# Allegro board KPRM_02v2.brd
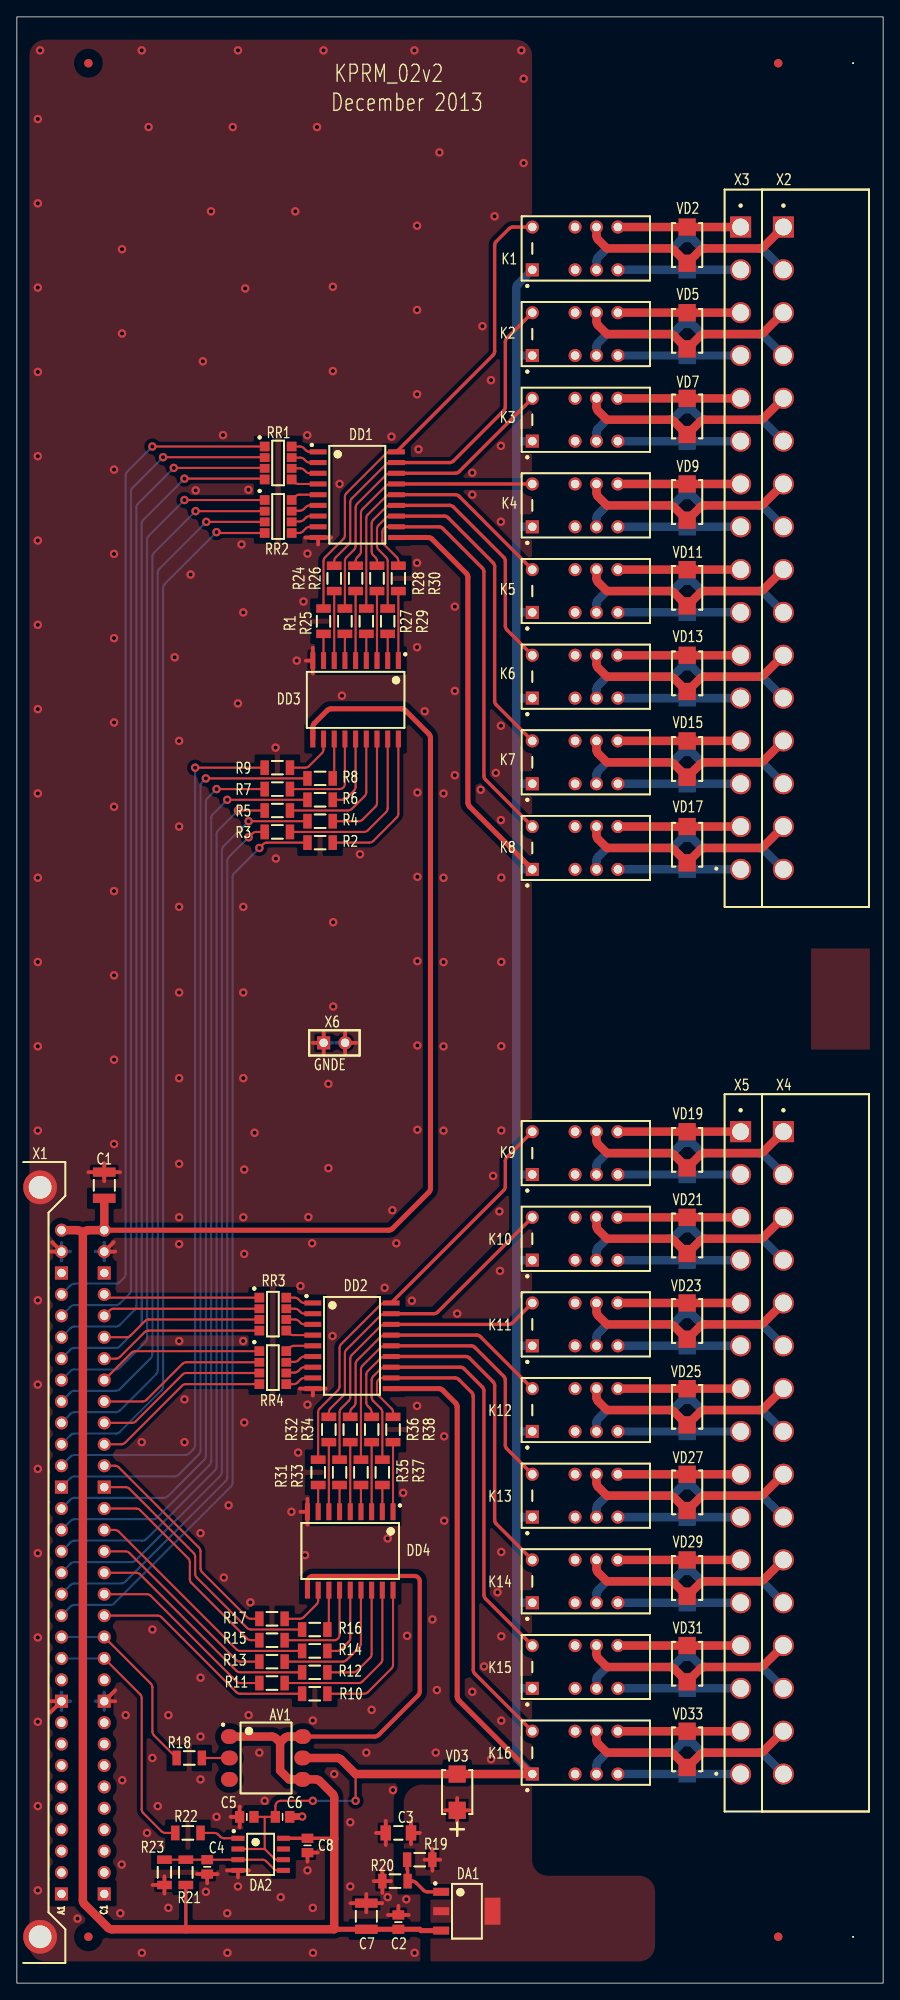
[diagram p0: board, top side]
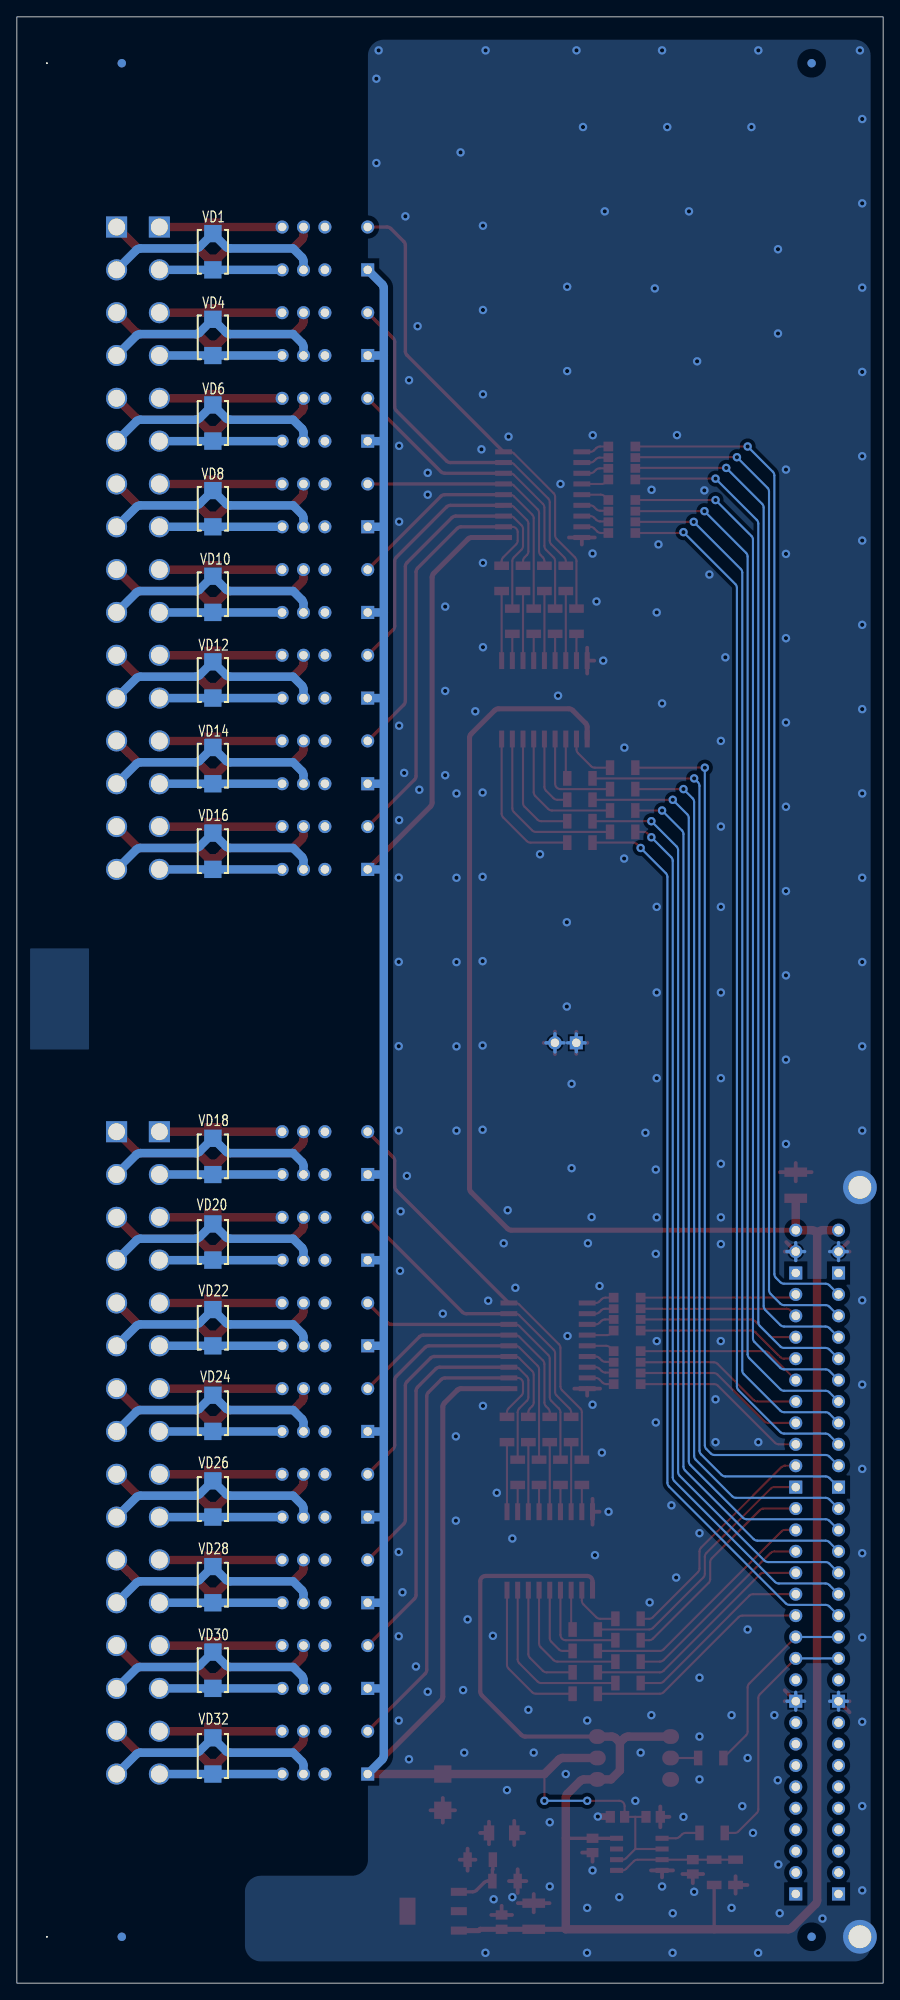
[diagram p1: board, bottom side, seen from below]

Outline 102.87 x 233.25 mm; copper layers: TOP, BOTTOM. Coordinates in mm from the lower left corner of the outline.
Outline path: rectangle 0,0 102.87,233.25

## Design rules (mm)
net group CC: nets CC0 CC1 CC2 CC3 CC4 CC5 CC6 CC7 CC8 CC9 CC10 CC11 CC12 CC13 CC14 CC15
net group CO: nets CO0 CO2 CO3 CO4 CO5 CO6 CO7 CO8 CO9 CO10 CO11 CO12 CO13 CO14 CO15

## Placement (name value [footprint] x y rotation side)
AV1  G3VM-351E  [SOIC254P978X342-6N]  29.59 26.71 0 top
C1  10.0u  [CAPC3225X270N]  10.38 94.65 90 top
C2  0.1u  [CAPC2013X95N]  45.3 7.24 90 top
C3  1.0u  [CAPC3216X145N]  45.3 17.82 180 top
C4  0.1u  [CAPC2013X95N]  22.61 13.79 270 top
C5  0.1u  [CAPC2013X95N]  27.31 19.72 180 top
C6  0.01u  [CAPC2013X95N]  31.55 19.72 0 top
C7  10.0u  [CAPC3225X270N]  41.49 7.94 90 top
C8  0.1u  [CAPC2013X95N]  34.51 16.33 270 top
DA1  LM317  [SOT230P700X180-4N]  53.43 8.53 0 top
DA2  LM293  [SOIC127P600X175-8N]  28.95 15.28 0 top
DD1  ULN2803A  [SOIC127P1030X265-18N]  40.43 176.57 0 top
DD2  ULN2803A  [SOIC127P1030X265-18N]  39.79 75.6 0 top
DD3  ULN2803A  [SOIC127P1030X265-18N]  40.22 152.23 270 top
DD4  ULN2803A  [SOIC127P1030X265-18N]  39.59 51.27 270 top
K1  FX2  [RELAY_FX2]  67.53 205.78 90 top
K2  FX2  [RELAY_FX2]  67.53 195.62 90 top
K3  FX2  [RELAY_FX2]  67.53 185.46 90 top
K4  FX2  [RELAY_FX2]  67.53 175.3 90 top
K5  FX2  [RELAY_FX2]  67.53 165.14 90 top
K6  FX2  [RELAY_FX2]  67.53 154.98 90 top
K7  FX2  [RELAY_FX2]  67.53 144.82 90 top
K8  FX2  [RELAY_FX2]  67.53 134.66 90 top
K9  FX2  [RELAY_FX2]  67.53 98.46 90 top
K10  FX2  [RELAY_FX2]  67.53 88.3 90 top
K11  FX2  [RELAY_FX2]  67.53 78.14 90 top
K12  FX2  [RELAY_FX2]  67.53 67.98 90 top
K13  FX2  [RELAY_FX2]  67.53 57.82 90 top
K14  FX2  [RELAY_FX2]  67.53 47.66 90 top
K15  FX2  [RELAY_FX2]  67.53 37.5 90 top
K16  FX2  [RELAY_FX2]  67.53 27.34 90 top
NOREF  -  [unnamed]  8.49 5.5 0 top
NOREF#2  -  [unnamed]  8.49 227.75 0 top
NOREF#3  -  [unnamed#2]  99.3 5.5 0 top
NOREF#4  -  [unnamed]  90.41 227.75 0 top
NOREF#5  -  [unnamed]  90.41 5.5 0 top
NOREF#6  -  [unnamed#2]  99.3 227.75 0 top
NOREF#7  -  [unnamed]  90.41 227.75 180 bottom
NOREF#8  -  [unnamed]  90.41 5.5 180 bottom
NOREF#9  -  [unnamed]  8.49 227.75 180 bottom
NOREF#10  -  [unnamed]  8.49 5.5 180 bottom
R1  18k  [RESC3116X65N]  36.41 161.56 90 top
R2  2k  [RESC3116X65N]  36.01 135.29 0 top
R3  2k  [RESC3116X65N]  30.93 136.56 0 top
R4  2k  [RESC3116X65N]  36.01 137.83 0 top
R5  2k  [RESC3116X65N]  30.93 139.1 0 top
R6  2k  [RESC3116X65N]  36.01 140.37 0 top
R7  2k  [RESC3116X65N]  30.93 141.64 0 top
R8  2k  [RESC3116X65N]  36.01 142.91 0 top
R9  2k  [RESC3116X65N]  30.93 144.18 0 top
R10  2k  [RESC3116X65N]  35.38 34.33 0 top
R11  2k  [RESC3116X65N]  30.3 35.6 0 top
R12  2k  [RESC3116X65N]  35.38 36.87 0 top
R13  2k  [RESC3116X65N]  30.3 38.14 0 top
R14  2k  [RESC3116X65N]  35.38 39.41 0 top
R15  2k  [RESC3116X65N]  30.3 40.68 0 top
R16  2k  [RESC3116X65N]  35.38 41.95 0 top
R17  2k  [RESC3116X65N]  30.3 43.22 0 top
R18  2k  [RESC3116X65N]  20.47 26.71 180 top
R19  270  [RESC3116X65N]  47.84 14.64 180 top
R20  1k  [RESC3116X65N]  44.9 12.1 0 top
R21  20k  [RESC3116X65N]  20.06 13.14 90 top
R22  2k  [RESC3116X65N]  20.31 17.82 180 top
R23  10k  [RESC3116X65N]  17.52 13.14 90 top
R24  18k  [RESC3116X65N]  37.68 166.64 90 top
R25  18k  [RESC3116X65N]  38.95 161.56 90 top
R26  18k  [RESC3116X65N]  40.22 166.64 90 top
R27  18k  [RESC3116X65N]  41.49 161.56 90 top
R28  18k  [RESC3116X65N]  42.77 166.64 90 top
R29  18k  [RESC3116X65N]  44.03 161.56 90 top
R30  18k  [RESC3116X65N]  45.3 166.64 90 top
R31  18k  [RESC3116X65N]  35.78 60.59 90 top
R32  18k  [RESC3116X65N]  37.05 65.67 90 top
R33  18k  [RESC3116X65N]  38.32 60.59 90 top
R34  18k  [RESC3116X65N]  39.59 65.67 90 top
R35  18k  [RESC3116X65N]  40.86 60.59 90 top
R36  18k  [RESC3116X65N]  42.13 65.67 90 top
R37  18k  [RESC3116X65N]  43.4 60.59 90 top
R38  18k  [RESC3116X65N]  44.67 65.67 90 top
RR1  4.7k  [RESCAX127P320X508X70-8N]  31.03 180.33 0 top
RR2  4.7k  [RESCAX127P320X508X70-8N]  31.03 173.98 0 top
RR3  4.7k  [RESCAX127P320X508X70-8N]  30.39 79.36 0 top
RR4  4.7k  [RESCAX127P320X508X70-8N]  30.39 73.01 0 top
VD1  300B  [DIOM5236X261N_NP]  79.59 205.39 90 bottom
VD2  300B  [DIOM5236X261N_NP]  79.59 206.17 90 top
VD3  STPS160U  [DIOM5236X261N]  52.29 22.65 270 top
VD4  300B  [DIOM5236X261N_NP]  79.59 195.23 90 bottom
VD5  300B  [DIOM5236X261N_NP]  79.59 196.01 90 top
VD6  300B  [DIOM5236X261N_NP]  79.59 185.07 90 bottom
VD7  300B  [DIOM5236X261N_NP]  79.59 185.85 90 top
VD8  300B  [DIOM5236X261N_NP]  79.59 174.91 90 bottom
VD9  300B  [DIOM5236X261N_NP]  79.59 175.69 90 top
VD10  300B  [DIOM5236X261N_NP]  79.59 164.75 90 bottom
VD11  300B  [DIOM5236X261N_NP]  79.59 165.53 90 top
VD12  300B  [DIOM5236X261N_NP]  79.59 154.59 90 bottom
VD13  300B  [DIOM5236X261N_NP]  79.59 155.37 90 top
VD14  300B  [DIOM5236X261N_NP]  79.59 144.43 90 bottom
VD15  300B  [DIOM5236X261N_NP]  79.59 145.21 90 top
VD16  300B  [DIOM5236X261N_NP]  79.59 134.27 90 bottom
VD17  300B  [DIOM5236X261N_NP]  79.59 135.05 90 top
VD18  300B  [DIOM5236X261N_NP]  79.59 98.07 90 bottom
VD19  300B  [DIOM5236X261N_NP]  79.59 98.85 90 top
VD20  300B  [DIOM5236X261N_NP]  79.59 87.91 90 bottom
VD21  300B  [DIOM5236X261N_NP]  79.59 88.69 90 top
VD22  300B  [DIOM5236X261N_NP]  79.59 77.75 90 bottom
VD23  300B  [DIOM5236X261N_NP]  79.59 78.53 90 top
VD24  300B  [DIOM5236X261N_NP]  79.59 67.59 90 bottom
VD25  300B  [DIOM5236X261N_NP]  79.59 68.37 90 top
VD26  300B  [DIOM5236X261N_NP]  79.59 57.43 90 bottom
VD27  300B  [DIOM5236X261N_NP]  79.59 58.21 90 top
VD28  300B  [DIOM5236X261N_NP]  79.59 47.27 90 bottom
VD29  300B  [DIOM5236X261N_NP]  79.59 48.05 90 top
VD30  300B  [DIOM5236X261N_NP]  79.59 37.11 90 bottom
VD31  300B  [DIOM5236X261N_NP]  79.59 37.89 90 top
VD32  300B  [DIOM5236X261N_NP]  79.59 26.95 90 bottom
VD33  300B  [DIOM5236X261N_NP]  79.59 27.73 90 top
X1  DIN-32x2  [DIN_41612_64_MR]  2.12 49.95 0 top
X2  231-576/001-000  [WAGO_231_576_001_000]  94.83 170.22 0 top
X3  232-376  [WAGO_232_376]  92.3 170.22 0 top
X4  231-576/001-000  [WAGO_231_576_001_000]  94.83 62.9 0 top
X5  232-376  [WAGO_232_376]  92.3 62.9 0 top
X6  GNDE  [HDRV1X2P254]  37.7 111.55 0 top

## Library data of the parts
AV1 = OPTO_RELAY_1: alternate symbols: (SOIC254P978X342-6M)
C1-C8 = CAP_NP
DA1 = LM317EMP
DA2 = LM293
DD1-DD4 = ULN2803A
K1-K16 = RELAY_FX2
R1-R38 = RES_0.25W
RR1-RR4 = RES_ARRAY_4
VD1 VD2 VD4-VD33 = DIODE_TVS_BI
VD3 = DIODE_SCHOTTKY
X1 = CON_32X2
X2-X5 = CON_16
X6 = CON_2

## Footprints (pads in the part's own frame, mm; a bottom-side part is the same pattern mirrored in y, then rotated)
CAPC2013X95N
  rect 1.1x1.4 smd: 1(-0.85,0) 2(0.85,0)
CAPC3216X145N
  rect 1.25x1.8 smd: 1(-1.5,0) 2(1.5,0)
CAPC3225X270N
  rect 1.1x2.7 smd: 1(-1.55,0) 2(1.55,0)
DIN_41612_64_MR
  rect 1.55x1.55 hole 1: A1(3.175,-39.37) A10(3.175,-16.51) A20(3.175,8.89) A30(3.175,34.29) C1(8.255,-39.37) C10(8.255,-16.51) C20(8.255,8.89) C30(8.255,34.29)
  round 1.55 hole 1: A2(3.175,-36.83) A3(3.175,-34.29) A4(3.175,-31.75) A5(3.175,-29.21) A6(3.175,-26.67) A7(3.175,-24.13) A8(3.175,-21.59) A9(3.175,-19.05) A11(3.175,-13.97) A12(3.175,-11.43) A13(3.175,-8.89) A14(3.175,-6.35) A15(3.175,-3.81) A16(3.175,-1.27) A17(3.175,1.27) A18(3.175,3.81) A19(3.175,6.35) A21(3.175,11.43) A22(3.175,13.97) A23(3.175,16.51) A24(3.175,19.05) A25(3.175,21.59) A26(3.175,24.13) A27(3.175,26.67) A28(3.175,29.21) A29(3.175,31.75) A31(3.175,36.83) A32(3.175,39.37) C2(8.255,-36.83) C3(8.255,-34.29) C4(8.255,-31.75) C5(8.255,-29.21) C6(8.255,-26.67) C7(8.255,-24.13) C8(8.255,-21.59) C9(8.255,-19.05) C11(8.255,-13.97) C12(8.255,-11.43) C13(8.255,-8.89) C14(8.255,-6.35) C15(8.255,-3.81) C16(8.255,-1.27) C17(8.255,1.27) C18(8.255,3.81) C19(8.255,6.35) C21(8.255,11.43) C22(8.255,13.97) C23(8.255,16.51) C24(8.255,19.05) C25(8.255,21.59) C26(8.255,24.13) C27(8.255,26.67) C28(8.255,29.21) C29(8.255,31.75) C31(8.255,36.83) C32(8.255,39.37)
  round 4 hole 2.7: HOLE1(0.635,-44.45) HOLE2(0.635,44.45)
DIOM5236X261N
  rect 2.05x2.05 smd: A(2.15,0) C(-2.15,0)
DIOM5236X261N_NP
  rect 2.05x2.05 smd: A(2.15,0) C(-2.15,0)
HDRV1X2P254
  rect 1.55x1.55 hole 1: 1(-1.27,0)
  round 1.6 hole 1: 2(1.27,0)
RELAY_FX2
  rect 1.55x1.55 hole 1: 1(-2.54,6.32)
  round 1.55 hole 1: 3(-2.54,1.24) 4(-2.54,-1.3) 5(-2.54,-3.84) 6(2.54,-3.84) 7(2.54,-1.3) 8(2.54,1.24) 10(2.54,6.32)
RESC3116X65N
  rect 1x1.75 smd: 1(-1.5,0) 2(1.5,0)
RESCAX127P320X508X70-8N
  rect 1.15x1.15 smd: 1(-1.6,1.955) 4(-1.6,-1.955) 5(1.6,-1.955) 8(1.6,1.955)
  rect 1.15x1.05 smd: 2(-1.6,0.635) 3(-1.6,-0.635) 6(1.6,-0.635) 7(1.6,0.635)
SOIC127P600X175-8N
  rect 1.55x0.6 smd: 1(-2.7,1.905) 2(-2.7,0.635) 3(-2.7,-0.635) 4(-2.7,-1.905) 5(2.7,-1.905) 6(2.7,-0.635) 7(2.7,0.635) 8(2.7,1.905)
SOIC127P1030X265-18N
  rect 2x0.6 smd: 1(-4.65,5.08) 2(-4.65,3.81) 3(-4.65,2.54) 4(-4.65,1.27) 5(-4.65,0) 6(-4.65,-1.27) 7(-4.65,-2.54) 8(-4.65,-3.81) 9(-4.65,-5.08) 10(4.65,-5.08) 11(4.65,-3.81) 12(4.65,-2.54) 13(4.65,-1.27) 14(4.65,0) 15(4.65,1.27) 16(4.65,2.54) 17(4.65,3.81) 18(4.65,5.08)
SOIC254P978X342-6N
  oval 2x1.75 smd: 1(-4.35,2.54) 2(-4.35,0) 3(-4.35,-2.54) 4(4.35,-2.54) 5(4.35,0) 6(4.35,2.54)
SOT230P700X180-4N
  rect 1.9x0.95 smd: 1(-3.05,2.3) 2(-3.05,0) 3(-3.05,-2.3)
  rect 1.9x3.2 smd: 4(3.05,0)
unnamed
  round 1 smd: (0,0)
unnamed#2
  round 0.2 hole 2.7 unplated: (0,0)
WAGO_231_576_001_000
  rect 2.5x2.5 hole 2: 1(-3.81,38.1)
  round 2.5 hole 2: 2(-3.81,33.02) 3(-3.81,27.94) 4(-3.81,22.86) 5(-3.81,17.78) 6(-3.81,12.7) 7(-3.81,7.62) 8(-3.81,2.54) 9(-3.81,-2.54) 10(-3.81,-7.62) 11(-3.81,-12.7) 12(-3.81,-17.78) 13(-3.81,-22.86) 14(-3.81,-27.94) 15(-3.81,-33.02) 16(-3.81,-38.1)
WAGO_232_376
  rect 2.5x2.5 hole 2: 1(-6.35,38.1)
  round 2.5 hole 2: 2(-6.35,33.02) 3(-6.35,27.94) 4(-6.35,22.86) 5(-6.35,17.78) 6(-6.35,12.7) 7(-6.35,7.62) 8(-6.35,2.54) 9(-6.35,-2.54) 10(-6.35,-7.62) 11(-6.35,-12.7) 12(-6.35,-17.78) 13(-6.35,-22.86) 14(-6.35,-27.94) 15(-6.35,-33.02) 16(-6.35,-38.1)

## Nets
GNDE: C1.2 C2.2 C3.2 C4.2 C5.2 C6.2 C7.2 C8.2 DA2.4 DD1.9(GND) DD2.9(GND) DD3.9(GND) DD4.9(GND) R20.1 R23.1 X1.A10 X1.A31 X1.C10 X1.C31 X1.HOLE1 X1.HOLE2 X6.1 X6.2
1K1-1: K1.5(NO1) VD1.C X3.2
1K1-2: K1.4(01) VD1.A X2.2
1K2-1: K1.6(NO2) VD2.A X3.1
1K2-2: K1.7(02) VD2.C X2.1
2K1-1: K2.5(NO1) VD4.C X3.4
2K1-2: K2.4(01) VD4.A X2.4
2K2-1: K2.6(NO2) VD5.A X3.3
2K2-2: K2.7(02) VD5.C X2.3
3K1-1: K3.5(NO1) VD6.C X3.6
3K1-2: K3.4(01) VD6.A X2.6
3K2-1: K3.6(NO2) VD7.A X3.5
3K2-2: K3.7(02) VD7.C X2.5
4K1-1: K4.5(NO1) VD8.C X3.8
4K1-2: K4.4(01) VD8.A X2.8
4K2-1: K4.6(NO2) VD9.A X3.7
4K2-2: K4.7(02) VD9.C X2.7
5K1-1: K5.5(NO1) VD10.C X3.10
5K1-2: K5.4(01) VD10.A X2.10
5K2-1: K5.6(NO2) VD11.A X3.9
5K2-2: K5.7(02) VD11.C X2.9
6K1-1: K6.5(NO1) VD12.C X3.12
6K1-2: K6.4(01) VD12.A X2.12
6K2-1: K6.6(NO2) VD13.A X3.11
6K2-2: K6.7(02) VD13.C X2.11
7K1-1: K7.5(NO1) VD14.C X3.14
7K1-2: K7.4(01) VD14.A X2.14
7K2-1: K7.6(NO2) VD15.A X3.13
7K2-2: K7.7(02) VD15.C X2.13
8K1-1: K8.5(NO1) VD16.C X3.16
8K1-2: K8.4(01) VD16.A X2.16
8K2-1: K8.6(NO2) VD17.A X3.15
8K2-2: K8.7(02) VD17.C X2.15
9K1-1: K9.5(NO1) VD18.C X5.2
9K1-2: K9.4(01) VD18.A X4.2
9K2-1: K9.6(NO2) VD19.A X5.1
9K2-2: K9.7(02) VD19.C X4.1
10K1-1: K10.5(NO1) VD20.C X5.4
10K1-2: K10.4(01) VD20.A X4.4
10K2-1: K10.6(NO2) VD21.A X5.3
10K2-2: K10.7(02) VD21.C X4.3
11K1-1: K11.5(NO1) VD22.C X5.6
11K1-2: K11.4(01) VD22.A X4.6
11K2-1: K11.6(NO2) VD23.A X5.5
11K2-2: K11.7(02) VD23.C X4.5
12K1-1: K12.5(NO1) VD24.C X5.8
12K1-2: K12.4(01) VD24.A X4.8
12K2-1: K12.6(NO2) VD25.A X5.7
12K2-2: K12.7(02) VD25.C X4.7
13K1-1: K13.5(NO1) VD26.C X5.10
13K1-2: K13.4(01) VD26.A X4.10
13K2-1: K13.6(NO2) VD27.A X5.9
13K2-2: K13.7(02) VD27.C X4.9
14K1-1: K14.5(NO1) VD28.C X5.12
14K1-2: K14.4(01) VD28.A X4.12
14K2-1: K14.6(NO2) VD29.A X5.11
14K2-2: K14.7(02) VD29.C X4.11
15K1-1: K15.5(NO1) VD30.C X5.14
15K1-2: K15.4(01) VD30.A X4.14
15K2-1: K15.6(NO2) VD31.A X5.13
15K2-2: K15.7(02) VD31.C X4.13
16K1-1: K16.5(NO1) VD32.C X5.16
16K1-2: K16.4(01) VD32.A X4.16
16K2-1: K16.6(NO2) VD33.A X5.15
16K2-2: K16.7(02) VD33.C X4.15
+24BE: AV1.1 AV1.4 AV1.6 C1.1 C2.1 C7.1 C8.1 DA1.3(IN) DA2.8 DD3.10(COM) DD4.10(COM) R21.1 X1.A32 X1.C32
+UK: AV1.5 C5.1 C6.1 DA2.2(IN-) DA2.6(IN-) DD1.10(COM) DD2.10(COM) K1.1(IN+) K2.1(IN+) K3.1(IN+) K4.1(IN+) K5.1(IN+) K6.1(IN+) K7.1(IN+) K8.1(IN+) K9.1(IN+) K10.1(IN+) K11.1(IN+) K12.1(IN+) K13.1(IN+) K14.1(IN+) K15.1(IN+) K16.1(IN+) VD3.C
CC0: DD3.8(8B) R1.1
CC1: DD3.7(7B) R24.1
CC2: DD3.6(6B) R25.1
CC3: DD3.5(5B) R26.1
CC4: DD3.4(4B) R27.1
CC5: DD3.3(3B) R28.1
CC6: DD3.2(2B) R29.1
CC7: DD3.1(1B) R30.1
CC8: DD4.8(8B) R31.1
CC9: DD4.7(7B) R32.1
CC10: DD4.6(6B) R33.1
CC11: DD4.5(5B) R34.1
CC12: DD4.4(4B) R35.1
CC13: DD4.3(3B) R36.1
CC14: DD4.2(2B) R37.1
CC15: DD4.1(1B) R38.1
CO0: DD1.18(1C) K1.10(IN-) R1.2
CO1: DD1.17(2C) K2.10(IN-) R24.2
CO2: DD1.16(3C) K3.10(IN-) R25.2
CO3: DD1.15(4C) K4.10(IN-) R26.2
CO4: DD1.14(5C) K5.10(IN-) R27.2
CO5: DD1.13(6C) K6.10(IN-) R28.2
CO6: DD1.12(7C) K7.10(IN-) R29.2
CO7: DD1.11(8C) K8.10(IN-) R30.2
CO8: DD2.18(1C) K9.10(IN-) R31.2
CO9: DD2.17(2C) K10.10(IN-) R32.2
CO10: DD2.16(3C) K11.10(IN-) R33.2
CO11: DD2.15(4C) K12.10(IN-) R34.2
CO12: DD2.14(5C) K13.10(IN-) R35.2
CO13: DD2.13(6C) K14.10(IN-) R36.2
CO14: DD2.12(7C) K15.10(IN-) R37.2
CO15: DD2.11(8C) K16.10(IN-) R38.2
COMO0: RR1.1 X1.A29
COMO1: RR1.2 X1.A28
COMO2: RR1.3 X1.A27
COMO3: RR1.4 X1.A26
COMO4: RR2.1 X1.A25
COMO5: RR2.2 X1.A24
COMO6: RR2.3 X1.A23
COMO7: RR2.4 X1.A22
COMO8: RR3.1 X1.C29
COMO9: RR3.2 X1.C28
COMO10: RR3.3 X1.C27
COMO11: RR3.4 X1.C26
COMO12: RR4.1 X1.C25
COMO13: RR4.2 X1.C24
COMO14: RR4.3 X1.C23
COMO15: RR4.4 X1.C22
ENABLE: R18.2 X1.A13 X1.C13
KCOMO0: R9.1 X1.A21
KCOMO1: R8.1 X1.A20
KCOMO2: R7.1 X1.A19
KCOMO3: R6.1 X1.A18
KCOMO4: R5.1 X1.A17
KCOMO5: R4.1 X1.A16
KCOMO6: R3.1 X1.A15
KCOMO7: R2.1 X1.A14
KCOMO8: R17.1 X1.C21
KCOMO9: R16.1 X1.C20
KCOMO10: R15.1 X1.C19
KCOMO11: R14.1 X1.C18
KCOMO12: R13.1 X1.C17
KCOMO13: R12.1 X1.C16
KCOMO14: R11.1 X1.C15
KCOMO15: R10.1 X1.C14
KENABLE: R22.2 X1.A12 X1.C12
N1355638: C3.1 DA1.2(OUT#1) DA1.4(OUT#2) R19.1 VD3.A
N1355646: C4.1 DA2.3(IN+) DA2.5(IN+) R21.2 R23.2
N1356446: DD1.4(4B) RR1.5
N1356458: DD1.3(3B) RR1.6
N1356478: DD1.2(2B) RR1.7
N1356494: DD1.1(1B) RR1.8
N1356502: DD1.5(5B) RR2.8
N1356524: DD1.6(6B) RR2.7
N1356542: DD1.7(7B) RR2.6
N1356554: DD1.8(8B) RR2.5
N1357124: DD2.4(4B) RR3.5
N1357136: DD2.3(3B) RR3.6
N1357148: DD2.2(2B) RR3.7
N1357164: DD2.1(1B) RR3.8
N1357172: DD2.5(5B) RR4.8
N1357190: DD2.6(6B) RR4.7
N1357214: DD2.7(7B) RR4.6
N1357226: DD2.8(8B) RR4.5
N1358398: DA1.1(ADJ) R19.2 R20.2
N1359348: DD3.15(4C) R5.2
N1359364: DD3.14(5C) R6.2
N1359384: DD3.13(6C) R7.2
N1359396: DD3.12(7C) R8.2
N1359412: DD3.11(8C) R9.2
N1359430: DD3.16(3C) R4.2
N1359442: DD3.17(2C) R3.2
N1359460: DD3.18(1C) R2.2
N1359476: DD4.18(1C) R10.2
N1359548: DD4.17(2C) R11.2
N1359630: DD4.16(3C) R12.2
N1359720: DD4.15(4C) R13.2
N1359780: DD4.14(5C) R14.2
N1359844: DD4.13(6C) R15.2
N1359856: DD4.12(7C) R16.2
N1359868: DD4.11(8C) R17.2
N1360082: AV1.2 R18.1
N1360698: DA2.1(OUT) R22.1

Pads without a net: AV1 3; DA2 7; K1 3 8; K2 3 8; K3 3 8; K4 3 8; K5 3 8; K6 3 8; K7 3 8; K8 3 8; K9 3 8; K10 3 8; K11 3 8; K12 3 8; K13 3 8; K14 3 8; K15 3 8; K16 3 8; X1 A1 A2 A3 A4 A5 A6 A7 A8 A9 A11 A30 C1 C2 C3 C4 C5 C6 C7 C8 C9 C11 C30

## Via types
v1: diameter 1, hole 0.5, TOP to BOTTOM, 220 vias

## Routing (per net, layer and track width the routed paths; a pad name or vN(x,y) marks a point on that pad's centre or on a via; arc(x,y) is an arc through that point)
GNDE: length 102.9
  TOP w0.453: 26.25,12.54 DA2.4 ; DA2.4 27.56,13.37 ; DA2.4 24.95,13.37 ; 10.38,95.12 C1.2 ; C1.2 10.38,97.28 ; C1.2 12.26,96.2 ; C1.2 8.5,96.2 ; DD4.9 34.51,57.45 ; DD4.9 34.51,54.39 ; DD4.9 33.68,55.92 ; X6.1 36.43,112.85 ; X6.1 35.13,111.55 ; X6.1 36.43,110.24 ; R23.1 17.52,12.67 ; R23.1 17.52,10.62 ; R23.1 16.12,11.64 ; C5.2 26.46,20.95 ; C5.2 25.38,19.72 ; C5.2 26.46,18.5 ; 34.25,171.49 DD1.9 ; DD1.9 37.31,171.49 ; DD1.9 35.78,170.66 ; R20.1 43.4,13.51 ; R20.1 43.4,10.7 ; R20.1 44.43,12.1 ; R20.1 42.37,12.1 ; 21.38,12.94 C4.2 ; C4.2 22.61,11.87 ; C4.2 23.83,12.94 ; DD3.9 35.14,158.41 ; DD3.9 35.14,155.36 ; DD3.9 34.32,156.88 ; C7.2 43.37,9.49 ; C7.2 39.62,9.49 ; C7.2 41.49,10.57 ; C7.2 41.49,8.41 ; 11.5,87.9 X1.C31 11.68,86.78 ; C2.2 45.3,9.17 ; C2.2 44.08,8.09 ; C2.2 46.53,8.09 ; 43.8,16.39 C3.2 ; C3.2 43.8,19.25 ; C3.2 42.65,17.82 ; 11.68,34.74 X1.C10 11.68,33.44 ; 4,86.78 X1.A31 4.18,87.9 ; 38.97,110.22 X6.2 ; X6.2 38.97,112.87 ; X6.2 40.3,111.55 ; 35.14,69.69 DD2.9 ; DD2.9 36.67,70.52 ; DD2.9 33.62,70.52 ; 4,32.14 X1.A10 4,33.44 ; 35.74,15.48 C8.2 34.51,14.41
  TOP w0.8: v1(33.88,19.76) 32.44,19.76 C6.2
  BOTTOM w0.403: X1.A10 5.3,34.49 ; X1.A10 4.25,33.44 ; X1.A10 5.3,32.39 ; X1.A10 6.35,33.44 ; X1.C10 11.43,33.44 ; X1.C10 9.33,33.44 ; X1.C10 10.38,34.49 ; X1.C10 10.38,32.39 ; X6.2 40.05,111.55 ; X6.2 38.97,112.62 ; X6.2 37.9,111.55 ; X6.2 38.97,110.47 ; 9.33,86.78 X1.C31 ; X1.C31 11.43,86.78 ; X1.C31 10.38,85.73 ; X1.C31 10.38,87.83 ; 36.43,110.49 X6.1 ; X6.1 36.43,112.6 ; X6.1 35.38,111.55 ; X6.1 37.49,111.55 ; 5.3,85.73 X1.A31 ; X1.A31 4.25,86.78 ; X1.A31 6.35,86.78 ; X1.A31 5.3,87.83
  vias: v1(2.49,221.13) v1(2.49,211.13) v1(2.49,201.13) v1(2.49,191.13) v1(2.49,181.13) v1(2.49,171.13) v1(2.49,161.13) v1(2.49,151.13) v1(2.49,141.13) v1(2.49,131.13) v1(2.49,121.13) v1(2.49,111.13) v1(2.49,101.13) v1(2.49,81) v1(2.49,71) v1(2.49,61) v1(2.49,51) v1(2.49,41) v1(2.49,31) v1(2.49,21) v1(2.49,11) v1(2.76,229.27) v1(7.2,7.66) v1(11.54,179.55) v1(11.54,169.55) v1(11.54,159.55) v1(11.54,149.55) v1(11.54,139.55) v1(11.54,129.55) v1(11.54,119.55) v1(11.54,109.55) v1(11.54,99.55) v1(12.28,8.29) v1(12.45,14.07) v1(12.49,205.69) v1(12.49,195.69) v1(12.52,24.07) v1(12.92,31.79) v1(14.83,229.27) v1(14.83,64.17) v1(14.84,3.59) v1(15.46,17.82) v1(15.64,220.18) v1(16.09,41.95) v1(16.09,26.71) v1(16.73,20.99) v1(18,31.79) v1(18,8.93) v1(18.74,157.28) v1(19.27,147.36) v1(19.27,137.2) v1(19.27,127.67) v1(19.27,117.51) v1(19.27,107.35) v1(19.27,97.19) v1(19.27,90.84) v1(19.27,87.67) v1(19.28,76.16) v1(19.91,69.25) v1(19.91,64.17) v1(20.63,167.09) v1(21.23,177.08) v1(21.81,53.38) v1(21.81,36.23) v1(21.81,29.25) v1(21.81,24.17) v1(22.09,192.39) v1(22.44,10.83) v1(23.06,210.18) v1(23.72,19.72) v1(24.48,183.64) v1(24.58,48.11) v1(24.98,8.29) v1(25,3.59) v1(25.14,56.68) v1(25.64,220.18) v1(26.25,229.27) v1(26.25,151.8) v1(26.25,11.47) v1(26.68,170.67) v1(26.89,162.6) v1(26.89,127.67) v1(26.89,117.51) v1(26.89,107.35) v1(26.89,90.84) v1(26.88,76.16) v1(27,96.51) v1(27,86.51) v1(27,66.51) v1(27.11,201.04) v1(27.5,177.15) v1(27.52,31.79) v1(27.73,45.17) v1(28.23,100.87) v1(28.8,27.34) v1(29.43,21.63) v1(30.73,146.56) v1(30.76,133.41) v1(31.33,10.2) v1(32.61,55.92) v1(33.06,210.18) v1(33.24,156.88) v1(33.4,62.93) v1(33.68,82.7) v1(34.04,163.9) v1(34.22,50.77) v1(34.48,183.62) v1(34.51,169.58) v1(34.51,68.62) v1(34.51,13.37) v1(34.62,90.87) v1(35.06,87.77) v1(35.14,31.15) v1(35.14,8.93) v1(35.16,3.59) v1(35.64,220.18) v1(36.41,229.27) v1(37,106.68) v1(37,96.68) v1(37.52,201.23) v1(37.52,191.23) v1(37.48,76.76) v1(37.56,125.85) v1(37.56,115.85) v1(37.68,24.8) v1(38.32,177.84) v1(38.61,152.72) v1(39.59,19.09) v1(39.59,11.47) v1(40.75,133.92) v1(41.49,27.34) v1(42.13,32.42) v1(43.68,82.49) v1(44.03,52.74) v1(44.03,10.2) v1(44.48,183.45) v1(44.59,91.69) v1(44.67,22.9) v1(45.06,87.77) v1(45.88,58.16) v1(46.34,41.2) v1(46.25,9.95) v1(46.9,80.95) v1(47.21,229.27) v1(47.23,3.59) v1(47.52,208.48) v1(47.52,198.48) v1(47.52,188.48) v1(47.52,168.48) v1(47.52,158.48) v1(47.52,68.48) v1(47.56,141.23) v1(47.56,131.23) v1(47.56,121.23) v1(47.56,111.23) v1(47.56,101.23) v1(47.7,181.95) v1(48.43,150.87) v1(49.35,43.15) v1(49.75,27.34) v1(49.88,34.76) v1(50.18,217.17) v1(50.67,141.12) v1(50.67,131.12) v1(50.67,121.12) v1(50.67,111.12) v1(50.67,101.12) v1(50.74,64.86) v1(50.74,54.86) v1(52.01,163.29) v1(52.01,153.29) v1(52.01,143.29) v1(52.29,79.41) v1(54.08,179.16) v1(54.08,176.56) v1(54.08,34.56) v1(55.08,141.56) v1(55.28,196.55) v1(55.48,37.56) v1(56.3,190.15) v1(56.31,26.56) v1(56.55,95.76) v1(56.73,209.59) v1(56.88,143.56) v1(57.08,46.36) v1(57.3,91.55) v1(57.37,84.49) v1(57.48,182.36) v1(57.48,173.36) v1(57.48,149.16) v1(57.48,137.96) v1(57.52,131.15) v1(57.52,121.15) v1(57.52,111.15) v1(57.52,101.15) v1(57.52,51.15) v1(57.52,41.15) v1(57.52,31.15) v1(59.91,229.27) v1(60.18,225.91) v1(60.18,215.91)
1K1-1: length 14.6
  BOTTOM w1: 85.94,203.24 VD1.C K1.5
1K1-2: length 26.4
  BOTTOM w1: 91.02,203.24 88.67,205.59 arc(88.46,205.73) 88.22,205.78 81.62,205.78 arc(81.37,205.83) 81.17,205.97 VD1.A 78.02,205.97 arc(77.82,205.83) 77.57,205.78 70.07,205.78 69.02,204.72 arc(68.88,204.52) 68.83,204.28 K1.4
1K2-1: length 14.6
  TOP w1: 85.94,208.32 VD2.A K1.6
1K2-2: length 26.4
  TOP w1: 91.02,208.32 88.67,205.97 arc(88.46,205.83) 88.22,205.78 81.62,205.78 arc(81.37,205.73) 81.17,205.59 79.59,204.02 78.02,205.59 arc(77.82,205.73) 77.57,205.78 70.07,205.78 69.02,206.83 arc(68.88,207.04) 68.83,207.28 K1.7
2K1-1: length 14.6
  BOTTOM w1: X3.4 VD4.C K2.5
2K1-2: length 26.4
  BOTTOM w1: X2.4 88.67,195.43 arc(88.46,195.57) 88.22,195.62 81.62,195.62 arc(81.37,195.67) 81.17,195.81 VD4.A 78.02,195.81 arc(77.82,195.67) 77.57,195.62 70.07,195.62 69.02,194.56 arc(68.88,194.36) 68.83,194.12 K2.4
2K2-1: length 14.6
  TOP w1: 85.94,198.16 VD5.A K2.6
2K2-2: length 26.4
  TOP w1: 91.02,198.16 88.67,195.81 arc(88.46,195.67) 88.22,195.62 81.62,195.62 arc(81.37,195.57) 81.17,195.43 VD5.C 78.02,195.43 arc(77.82,195.57) 77.57,195.62 70.07,195.62 69.02,196.67 arc(68.88,196.88) 68.83,197.12 K2.7
3K1-1: length 14.6
  BOTTOM w1: X3.6 71.37,182.92
3K1-2: length 26.4
  BOTTOM w1: X2.6 88.67,185.27 arc(88.46,185.41) 88.22,185.46 81.62,185.46 arc(81.37,185.51) 81.17,185.65 VD6.A 78.02,185.65 arc(77.82,185.51) 77.57,185.46 70.07,185.46 69.02,184.41 arc(68.88,184.2) 68.83,183.96 68.83,182.92
3K2-1: length 14.6
  TOP w1: K3.6 VD7.A X3.5
3K2-2: length 26.4
  TOP w1: K3.7 68.83,186.96 arc(68.88,186.72) 69.02,186.51 70.07,185.46 77.57,185.46 arc(77.82,185.41) 78.02,185.27 VD7.C 81.17,185.27 arc(81.37,185.41) 81.62,185.46 88.22,185.46 arc(88.46,185.51) 88.67,185.65 X2.5
4K1-1: length 14.6
  BOTTOM w1: K4.5 VD8.C X3.8
4K1-2: length 26.4
  BOTTOM w1: X2.8 88.67,175.11 arc(88.46,175.25) 88.22,175.3 81.62,175.3 arc(81.37,175.35) 81.17,175.49 VD8.A 78.02,175.49 arc(77.82,175.35) 77.57,175.3 70.07,175.3 69.02,174.25 arc(68.88,174.04) 68.83,173.8 K4.4
4K2-1: length 14.6
  TOP w1: K4.6 VD9.A X3.7
4K2-2: length 26.4
  TOP w1: X2.7 88.67,175.49 arc(88.46,175.35) 88.22,175.3 81.62,175.3 arc(81.37,175.25) 81.17,175.11 VD9.C 78.02,175.11 arc(77.82,175.25) 77.57,175.3 70.07,175.3 69.02,176.35 arc(68.88,176.56) 68.83,176.8 K4.7
5K1-1: length 14.6
  BOTTOM w1: K5.5 VD10.C X3.10
5K1-2: length 26.4
  BOTTOM w1: K5.4 68.83,163.64 arc(68.88,163.88) 69.02,164.09 70.07,165.14 77.57,165.14 arc(77.82,165.19) 78.02,165.32 VD10.A 81.17,165.32 arc(81.37,165.19) 81.62,165.14 88.22,165.14 arc(88.46,165.09) 88.67,164.95 X2.10
5K2-1: length 14.6
  TOP w1: X3.9 VD11.A K5.6
5K2-2: length 26.4
  TOP w1: K5.7 68.83,166.64 arc(68.88,166.4) 69.02,166.19 70.07,165.14 77.57,165.14 arc(77.82,165.09) 78.02,164.95 VD11.C 81.17,164.95 arc(81.37,165.09) 81.62,165.14 88.22,165.14 arc(88.46,165.19) 88.67,165.32 X2.9
6K1-1: length 14.6
  BOTTOM w1: K6.5 VD12.C X3.12
6K1-2: length 26.4
  BOTTOM w1: X2.12 88.67,154.79 arc(88.46,154.93) 88.22,154.98 81.62,154.98 arc(81.37,155.03) 81.17,155.17 VD12.A 78.02,155.17 arc(77.82,155.03) 77.57,154.98 70.07,154.98 69.02,153.93 arc(68.88,153.72) 68.83,153.48 K6.4
6K2-1: length 14.6
  TOP w1: X3.11 VD13.A K6.6
6K2-2: length 26.4
  TOP w1: K6.7 68.83,156.48 arc(68.88,156.24) 69.02,156.03 70.07,154.98 77.57,154.98 arc(77.82,154.93) 78.02,154.79 VD13.C 81.17,154.79 arc(81.37,154.93) 81.62,154.98 88.22,154.98 arc(88.46,155.03) 88.67,155.17 X2.11
7K1-1: length 14.6
  BOTTOM w1: X3.14 VD14.C K7.5
7K1-2: length 26.4
  BOTTOM w1: K7.4 68.83,143.32 arc(68.88,143.56) 69.02,143.76 70.07,144.82 77.57,144.82 arc(77.82,144.87) 78.02,145 79.59,146.58 81.17,145 arc(81.37,144.87) 81.62,144.82 88.22,144.82 arc(88.46,144.77) 88.67,144.63 X2.14
7K2-1: length 14.6
  TOP w1: 71.37,147.36 85.94,147.36
7K2-2: length 26.4
  TOP w1: 68.83,147.36 68.83,146.32 arc(68.88,146.08) 69.02,145.87 70.07,144.82 77.57,144.82 arc(77.82,144.77) 78.02,144.63 VD15.C 81.17,144.63 arc(81.37,144.77) 81.62,144.82 88.22,144.82 arc(88.46,144.87) 88.67,145 91.02,147.36
8K1-1: length 14.6
  BOTTOM w1: X3.16 VD16.C K8.5
8K1-2: length 26.4
  BOTTOM w1: X2.16 88.67,134.47 arc(88.46,134.61) 88.22,134.66 81.62,134.66 arc(81.37,134.71) 81.17,134.84 79.59,136.42 78.02,134.84 arc(77.82,134.71) 77.57,134.66 70.07,134.66 69.02,133.61 arc(68.88,133.4) 68.83,133.16 K8.4
8K2-1: length 14.6
  TOP w1: 71.37,137.2 X3.15
8K2-2: length 26.4
  TOP w1: 68.83,137.2 68.83,136.16 arc(68.88,135.92) 69.02,135.71 70.07,134.66 77.57,134.66 arc(77.82,134.61) 78.02,134.47 VD17.C 81.17,134.47 arc(81.37,134.61) 81.62,134.66 88.22,134.66 arc(88.46,134.71) 88.67,134.84 X2.15
9K1-1: length 14.6
  BOTTOM w1: X5.2 VD18.C K9.5
9K1-2: length 26.4
  BOTTOM w1: X4.2 88.67,98.28 arc(88.46,98.42) 88.22,98.46 81.62,98.46 arc(81.37,98.51) 81.17,98.65 VD18.A 78.02,98.65 arc(77.82,98.51) 77.57,98.46 70.07,98.46 69.02,97.41 arc(68.88,97.2) 68.83,96.96 K9.4
9K2-1: length 14.6
  TOP w1: X5.1 VD19.A K9.6
9K2-2: length 26.4
  TOP w1: K9.7 68.83,99.97 arc(68.88,99.72) 69.02,99.52 70.07,98.46 77.57,98.46 arc(77.82,98.42) 78.02,98.28 VD19.C 81.17,98.28 arc(81.37,98.42) 81.62,98.46 88.22,98.46 arc(88.46,98.51) 88.67,98.65 X4.1
10K1-1: length 14.6
  BOTTOM w1: K10.5 VD20.C X5.4
10K1-2: length 26.4
  BOTTOM w1: K10.4 68.83,86.8 arc(68.88,87.04) 69.02,87.25 70.07,88.3 77.57,88.3 arc(77.82,88.35) 78.02,88.49 VD20.A 81.17,88.49 arc(81.37,88.35) 81.62,88.3 88.22,88.3 arc(88.46,88.26) 88.67,88.12 X4.4
10K2-1: length 14.6
  TOP w1: X5.3 VD21.A K10.6
10K2-2: length 26.4
  TOP w1: X4.3 88.67,88.49 arc(88.46,88.35) 88.22,88.3 81.62,88.3 arc(81.37,88.26) 81.17,88.12 VD21.C 78.02,88.12 arc(77.82,88.26) 77.57,88.3 70.07,88.3 69.02,89.36 arc(68.88,89.56) 68.83,89.81 K10.7
11K1-1: length 14.6
  BOTTOM w1: K11.5 VD22.C X5.6
11K1-2: length 26.4
  BOTTOM w1: X4.6 88.67,77.96 arc(88.46,78.1) 88.22,78.14 81.62,78.14 arc(81.37,78.19) 81.17,78.33 VD22.A 78.02,78.33 arc(77.82,78.19) 77.57,78.14 70.07,78.14 69.02,77.09 arc(68.88,76.88) 68.83,76.64 K11.4
11K2-1: length 14.6
  TOP w1: X5.5 VD23.A K11.6
11K2-2: length 26.4
  TOP w1: X4.5 88.67,78.33 arc(88.46,78.19) 88.22,78.14 81.62,78.14 arc(81.37,78.1) 81.17,77.96 VD23.C 78.02,77.96 arc(77.82,78.1) 77.57,78.14 70.07,78.14 69.02,79.2 arc(68.88,79.4) 68.83,79.65 K11.7
12K1-1: length 14.6
  BOTTOM w1: K12.5 VD24.C X5.8
12K1-2: length 26.4
  BOTTOM w1: K12.4 68.83,66.48 arc(68.88,66.72) 69.02,66.93 70.07,67.98 77.57,67.98 arc(77.82,68.03) 78.02,68.17 VD24.A 81.17,68.17 arc(81.37,68.03) 81.62,67.98 88.22,67.98 arc(88.46,67.94) 88.67,67.8 X4.8
12K2-1: length 14.6
  TOP w1: K12.6 VD25.A X5.7
12K2-2: length 26.4
  TOP w1: K12.7 68.83,69.49 arc(68.88,69.24) 69.02,69.04 70.07,67.98 77.57,67.98 arc(77.82,67.94) 78.02,67.8 VD25.C 81.17,67.8 arc(81.37,67.94) 81.62,67.98 88.22,67.98 arc(88.46,68.03) 88.67,68.17 X4.7
13K1-1: length 14.6
  BOTTOM w1: X5.10 VD26.C K13.5
13K1-2: length 26.4
  BOTTOM w1: X4.10 88.67,57.64 arc(88.46,57.78) 88.22,57.82 81.62,57.82 arc(81.37,57.87) 81.17,58.01 VD26.A 78.02,58.01 arc(77.82,57.87) 77.57,57.82 70.07,57.82 69.02,56.77 arc(68.88,56.56) 68.83,56.32 K13.4
13K2-1: length 14.6
  TOP w1: X5.9 VD27.A K13.6
13K2-2: length 26.4
  TOP w1: K13.7 68.83,59.33 arc(68.88,59.08) 69.02,58.88 70.07,57.82 77.57,57.82 arc(77.82,57.78) 78.02,57.64 VD27.C 81.17,57.64 arc(81.37,57.78) 81.62,57.82 88.22,57.82 arc(88.46,57.87) 88.67,58.01 X4.9
14K1-1: length 14.6
  BOTTOM w1: X5.12 VD28.C K14.5
14K1-2: length 26.4
  BOTTOM w1: X4.12 88.67,47.48 arc(88.46,47.62) 88.22,47.66 81.62,47.66 arc(81.37,47.71) 81.17,47.85 VD28.A 78.02,47.85 arc(77.82,47.71) 77.57,47.66 70.07,47.66 69.02,46.61 arc(68.88,46.4) 68.83,46.16 K14.4
14K2-1: length 14.6
  TOP w1: K14.6 VD29.A X5.11
14K2-2: length 26.4
  TOP w1: X4.11 88.67,47.85 arc(88.46,47.71) 88.22,47.66 81.62,47.66 arc(81.37,47.62) 81.17,47.48 VD29.C 78.02,47.48 arc(77.82,47.62) 77.57,47.66 70.07,47.66 69.02,48.72 arc(68.88,48.92) 68.83,49.17 K14.7
15K1-1: length 14.6
  BOTTOM w1: X5.14 VD30.C K15.5
15K1-2: length 26.4
  BOTTOM w1: K15.4 68.83,36 arc(68.88,36.24) 69.02,36.45 70.07,37.5 77.57,37.5 arc(77.82,37.55) 78.02,37.69 VD30.A 81.17,37.69 arc(81.37,37.55) 81.62,37.5 88.22,37.5 arc(88.46,37.46) 88.67,37.32 X4.14
15K2-1: length 14.6
  TOP w1: X5.13 VD31.A K15.6
15K2-2: length 26.4
  TOP w1: K15.7 68.83,39.01 arc(68.88,38.76) 69.02,38.56 70.07,37.5 77.57,37.5 arc(77.82,37.46) 78.02,37.32 VD31.C 81.17,37.32 arc(81.37,37.46) 81.62,37.5 88.22,37.5 arc(88.46,37.55) 88.67,37.69 X4.13
16K1-1: length 14.6
  BOTTOM w1: X5.16 VD32.C K16.5
16K1-2: length 26.4
  BOTTOM w1: X4.16 88.67,27.16 arc(88.46,27.3) 88.22,27.34 81.62,27.34 arc(81.37,27.39) 81.17,27.53 VD32.A 78.02,27.53 arc(77.82,27.39) 77.57,27.34 70.07,27.34 69.02,26.29 arc(68.88,26.08) 68.83,25.84 K16.4
16K2-1: length 14.6
  TOP w1: K16.6 VD33.A X5.15
16K2-2: length 26.4
  TOP w1: X4.15 88.67,27.53 arc(88.46,27.39) 88.22,27.34 81.62,27.34 arc(81.37,27.3) 81.17,27.16 VD33.C 78.02,27.16 arc(77.82,27.3) 77.57,27.34 70.07,27.34 69.02,28.4 arc(68.88,28.6) 68.83,28.85 K16.7
+24BE: length 336.3
  TOP w0.4: 37.68,17.18 C8.1 DA2.8 ; R21.1 20.06,6.39
  TOP w0.5: DD4.10 34.51,47.66 arc(34.7,48.11) 35.14,48.3 47.21,48.3 arc(47.66,48.11) 47.84,47.66 47.84,34.59 arc(47.8,34.35) 47.66,34.14 42.95,29.44 arc(42.75,29.3) 42.5,29.25 AV1.6
  TOP w0.6: X1.C32 44.15,89.32 arc(44.4,89.37) 44.6,89.51 48.93,93.83 arc(49.07,94.04) 49.11,94.28 49.11,147.73 arc(49.07,147.97) 48.93,148.18 46.13,150.98 arc(45.92,151.12) 45.68,151.17 37.31,151.17 arc(37.07,151.12) 36.86,150.98 35.33,149.45 arc(35.19,149.24) 35.14,149 DD3.10 ; 37.68,6.39 C2.1 47.84,6.39 48,6.23 DA1.3
  TOP w1: 31.26,28.54 31.78,29.06 arc(31.99,29.2) 32.23,29.25 AV1.6 ; 31.26,28.54 30.74,29.06 arc(30.53,29.2) 30.29,29.25 AV1.1 ; 31.26,28.54 31.26,25.22 32.31,24.17 AV1.4 35.52,24.17 arc(35.76,24.12) 35.97,23.98 37.5,22.45 arc(37.64,22.24) 37.68,22 37.68,6.39 11.28,6.39 arc(11.03,6.44) 10.83,6.57 8.03,9.38 arc(7.89,9.58) 7.84,9.83 7.84,88.94 ; 7.84,88.94 8.03,89.13 arc(8.24,89.27) 8.48,89.32 X1.C32 C1.1 ; 7.84,88.94 7.64,89.13 arc(7.44,89.27) 7.2,89.32 X1.A32
+UK: length 365.8
  TOP w0.25: v1(40.22,21.63) 40.22,24.8 ; 29.43,19.72 C6.1 30.7,20.99 arc(30.89,21.44) 31.33,21.63 v1(35.14,21.63) ; 29.43,19.72 C5.1 ; 29.43,19.72 29.43,15.91 ; DA2.2 29.43,15.91 ; 29.43,15.91 30.51,14.83 arc(30.72,14.69) 30.96,14.64 DA2.6
  TOP w0.6: K16.1 52.48,33.54 arc(52.34,33.74) 52.29,33.99 52.29,68.36 arc(52.24,68.6) 52.1,68.81 50.57,70.34 arc(50.36,70.48) 50.12,70.52 DD2.10 ; K8.1 53.75,139.58 arc(53.61,139.79) 53.56,140.03 53.56,166.78 arc(53.51,167.02) 53.37,167.23 49.3,171.3 arc(49.09,171.44) 48.85,171.49 DD1.10
  TOP w1: AV1.5 38.06,26.71 arc(38.3,26.66) 38.51,26.52 40.22,24.8 VD3.C K16.1
  BOTTOM w0.25: v1(35.14,21.63) v1(40.22,21.63)
  BOTTOM w1: K13.1 59.29,55.28 ; 59.29,55.28 59.29,65.44 ; 59.29,55.28 59.29,45.12 ; 59.29,182.92 59.29,193.08 ; 59.29,182.92 61.21,182.92 ; 59.29,182.92 59.29,172.76 ; 59.29,193.08 K2.1 ; 59.29,193.08 59.29,201.06 arc(59.34,201.3) 59.48,201.51 K1.1 ; 59.29,95.92 59.29,132.12 ; 59.29,95.92 59.29,85.76 ; 59.29,95.92 K9.1 ; 59.29,132.12 59.29,142.28 ; 59.29,132.12 K8.1 ; 59.29,65.44 59.29,75.6 ; 59.29,65.44 K12.1 ; 59.29,75.6 59.29,85.76 ; 59.29,75.6 K11.1 ; K5.1 59.29,162.6 ; 59.29,162.6 59.29,152.44 ; 59.29,162.6 59.29,172.76 ; K14.1 59.29,45.12 ; 59.29,45.12 59.29,34.96 ; K16.1 59.48,26.53 arc(59.34,26.74) 59.29,26.98 59.29,34.96 ; 59.29,142.28 59.29,152.44 ; 59.29,142.28 K7.1 ; 59.29,152.44 K6.1 ; K10.1 59.29,85.76 ; K15.1 59.29,34.96 ; 59.29,172.76 K4.1
CC0: length 3.2
  TOP w0.25: R1.1 36.41,156.88
CC1: length 8.3
  TOP w0.25: DD3.7 R24.1
CC2: length 3.2
  TOP w0.25: R25.1 38.95,156.88
CC3: length 8.3
  TOP w0.25: R26.1 DD3.5
CC4: length 3.2
  TOP w0.25: R27.1 DD3.4
CC5: length 8.3
  TOP w0.25: R28.1 DD3.3
CC6: length 3.2
  TOP w0.25: R29.1 DD3.2
CC7: length 8.3
  TOP w0.25: R30.1 DD3.1
CC8: length 3.2
  TOP w0.25: R31.1 DD4.8
CC9: length 8.3
  TOP w0.25: R32.1 DD4.7
CC10: length 3.2
  TOP w0.25: R33.1 DD4.6
CC11: length 8.3
  TOP w0.25: R34.1 DD4.5
CC12: length 3.2
  TOP w0.25: R35.1 DD4.4
CC13: length 8.3
  TOP w0.25: R36.1 DD4.3
CC14: length 3.2
  TOP w0.25: R37.1 DD4.2
CC15: length 8.3
  TOP w0.25: R38.1 DD4.1
CO0: length 57.5
  TOP w0.25: DD1.18 44.3,181.65 arc(44.06,181.6) 43.85,181.46 39.14,176.75 arc(39,176.55) 38.95,176.31 38.95,171.75 arc(38.91,171.51) 38.77,171.3 36.6,169.13 arc(36.46,168.93) 36.41,168.69 R1.2
  TOP w0.4: DD1.18 56.55,193.12 arc(56.69,193.32) 56.73,193.57 56.73,206.15 arc(56.78,206.39) 56.92,206.6 58.45,208.13 arc(58.66,208.27) 58.9,208.32 K1.10
CO1: length 44
  TOP w0.25: 45.08,180.38 44.3,180.38 arc(44.06,180.33) 43.85,180.19 39.78,176.12 arc(39.64,175.91) 39.59,175.67 39.59,171.12 arc(39.54,170.87) 39.4,170.67 37.87,169.13 arc(37.73,168.93) 37.68,168.69 R24.2
  TOP w0.4: K2.10 58.19,195.14 arc(58.05,194.93) 58,194.69 58,186.99 arc(57.96,186.75) 57.82,186.54 51.84,180.56 arc(51.63,180.43) 51.39,180.38 45.08,180.38
CO2: length 38.9
  TOP w0.25: DD1.16 44.3,179.11 arc(44.06,179.06) 43.85,178.92 40.41,175.49 arc(40.27,175.28) 40.22,175.04 40.22,170.48 arc(40.18,170.24) 40.04,170.03 39.14,169.13 arc(39,168.93) 38.95,168.69 R25.2
  TOP w0.4: DD1.16 52.06,179.11 arc(52.3,179.16) 52.51,179.3 K3.10
CO3: length 28.3
  TOP w0.25: 45.08,177.84 44.3,177.84 arc(44.06,177.79) 43.85,177.65 41.05,174.85 arc(40.91,174.64) 40.86,174.4 40.86,169.85 arc(40.81,169.6) 40.67,169.4 40.41,169.13 arc(40.27,168.93) 40.22,168.69 R26.2
  TOP w0.4: K4.10 45.08,177.84
CO4: length 35.3
  TOP w0.25: R27.2 41.49,173.77 arc(41.54,174.01) 41.68,174.22 43.85,176.38 arc(44.06,176.52) 44.3,176.57 DD1.14
  TOP w0.4: K5.10 52.51,176.38 arc(52.3,176.52) 52.06,176.57 DD1.14
CO5: length 37.4
  TOP w0.25: DD1.13 44.3,175.3 arc(44.06,175.25) 43.85,175.11 42.32,173.58 arc(42.18,173.37) 42.13,173.13 42.13,169.85 arc(42.18,169.61) 42.32,169.4 42.58,169.14 arc(42.72,168.93) 42.77,168.69 R28.2
  TOP w0.4: K6.10 58.19,160.54 arc(58.05,160.74) 58,160.99 58,168.69 arc(57.96,168.93) 57.82,169.13 51.84,175.11 arc(51.63,175.25) 51.39,175.3 DD1.13
CO6: length 49.7
  TOP w0.25: DD1.12 44.3,174.03 arc(44.06,173.98) 43.85,173.84 42.95,172.94 arc(42.81,172.74) 42.77,172.5 42.77,170.48 arc(42.81,170.24) 42.95,170.03 43.85,169.14 arc(43.99,168.93) 44.03,168.69 R29.2
  TOP w0.4: 61.21,147.36 56.92,151.65 arc(56.78,151.85) 56.73,152.1 56.73,168.05 arc(56.69,168.29) 56.55,168.5 51.21,173.84 arc(51,173.98) 50.76,174.03 DD1.12
CO7: length 52
  TOP w0.25: DD1.11 44.03,172.76 arc(43.59,172.57) 43.4,172.12 43.4,171.12 arc(43.45,170.88) 43.59,170.67 45.12,169.14 arc(45.26,168.93) 45.3,168.69 R30.2
  TOP w0.4: DD1.11 50.12,172.76 arc(50.36,172.71) 50.57,172.57 55.28,167.86 arc(55.42,167.66) 55.46,167.41 55.46,143.21 arc(55.51,142.96) 55.65,142.76 61.21,137.2
CO8: length 49.9
  TOP w0.25: R31.2 35.78,67.72 arc(35.83,67.96) 35.97,68.17 38.13,70.34 arc(38.27,70.54) 38.32,70.79 38.32,75.34 arc(38.37,75.58) 38.51,75.79 43.21,80.5 arc(43.42,80.64) 43.66,80.68 DD2.18
  TOP w0.4: K9.10 58.19,97.99 arc(58.05,97.78) 58,97.54 58,94.51 arc(57.96,94.26) 57.82,94.06 DD2.18
CO9: length 37.3
  TOP w0.25: R32.2 37.05,67.72 arc(37.1,67.96) 37.24,68.17 38.77,69.7 arc(38.91,69.91) 38.95,70.15 38.95,74.71 arc(39,74.95) 39.14,75.16 43.21,79.23 arc(43.42,79.37) 43.66,79.41 DD2.17
  TOP w0.4: K10.10 49.97,79.6 arc(49.76,79.46) 49.52,79.41 DD2.17
CO10: length 36.9
  TOP w0.25: DD2.16 43.66,78.14 arc(43.42,78.1) 43.21,77.96 39.78,74.52 arc(39.64,74.31) 39.59,74.07 39.59,69.52 arc(39.54,69.27) 39.4,69.07 38.51,68.17 arc(38.37,67.96) 38.32,67.72 38.32,62.27
  TOP w0.4: DD2.16 58.41,78.14 arc(58.65,78.19) 58.86,78.33 K11.10 ; R33.2 38.32,62.27
CO11: length 31.6
  TOP w0.25: R34.2 39.59,67.72 arc(39.64,67.96) 39.78,68.17 40.04,68.43 arc(40.18,68.64) 40.22,68.88 40.22,73.44 arc(40.27,73.68) 40.41,73.88 43.21,76.69 arc(43.42,76.83) 43.66,76.87 DD2.15
  TOP w0.4: K12.10 55.05,76.69 arc(54.84,76.83) 54.6,76.87 DD2.15
CO12: length 43.4
  TOP w0.25: DD2.14 43.66,75.6 arc(43.42,75.56) 43.21,75.42 41.05,73.25 arc(40.91,73.04) 40.86,72.8 R35.2
  TOP w0.4: DD2.14 53.93,75.6 arc(54.17,75.56) 54.38,75.42 57.82,71.98 arc(57.96,71.77) 58,71.53 58,63.83 arc(58.05,63.59) 58.19,63.38 K13.10
CO13: length 45.5
  TOP w0.25: R36.2 42.13,67.72 arc(42.08,67.97) 41.94,68.17 41.68,68.43 arc(41.54,68.64) 41.49,68.88 41.49,72.17 arc(41.54,72.41) 41.68,72.62 43.21,74.15 arc(43.42,74.29) 43.66,74.33 DD2.13
  TOP w0.4: DD2.13 53.3,74.33 arc(53.54,74.29) 53.75,74.15 56.55,71.34 arc(56.69,71.14) 56.73,70.9 56.73,54.94 arc(56.78,54.7) 56.92,54.49 K14.10
CO14: length 57.8
  TOP w0.25: R37.2 43.4,67.72 arc(43.35,67.97) 43.21,68.17 42.32,69.07 arc(42.18,69.28) 42.13,69.52 42.13,71.53 arc(42.18,71.77) 42.32,71.98 43.21,72.88 arc(43.42,73.02) 43.66,73.06 DD2.12
  TOP w0.4: K15.10 55.65,45.6 arc(55.51,45.81) 55.46,46.05 55.46,70.26 arc(55.42,70.5) 55.28,70.71 53.11,72.88 arc(52.9,73.02) 52.66,73.06 DD2.12
CO15: length 60.1
  TOP w0.25: DD2.11 43.4,71.79 arc(42.95,71.61) 42.77,71.16 42.77,70.15 arc(42.81,69.91) 42.95,69.7 44.48,68.17 arc(44.62,67.97) 44.67,67.72 R38.2
  TOP w0.4: K16.10 54.38,36.71 arc(54.24,36.92) 54.2,37.16 54.2,69.63 arc(54.15,69.87) 54.01,70.07 52.48,71.61 arc(52.27,71.75) 52.03,71.79 DD2.11
COMO0: length 121.5
  TOP w0.25: v1(16.09,182.28) RR1.1
  BOTTOM w0.25: X1.A29 6.38,82.78 arc(6.59,82.92) 6.83,82.97 11.77,82.97 arc(12.01,83.02) 12.22,83.16 12.73,83.67 arc(12.87,83.88) 12.92,84.12 12.92,178.85 arc(12.97,179.09) 13.11,179.3 v1(16.09,182.28)
COMO1: length 122
  TOP w0.25: RR1.2 29.38,181.01 v1(17.36,181.01)
  BOTTOM w0.25: X1.A28 6.38,80.24 arc(6.59,80.38) 6.83,80.43 11.77,80.43 arc(12.01,80.48) 12.22,80.62 13.37,81.77 arc(13.51,81.97) 13.55,82.22 13.55,176.94 arc(13.6,177.18) 13.74,177.39 v1(17.36,181.01)
COMO2: length 122.6
  TOP w0.25: v1(18.63,179.74) 29.38,179.74 RR1.3
  BOTTOM w0.25: X1.A27 6.38,77.7 arc(6.59,77.84) 6.83,77.89 11.77,77.89 arc(12.01,77.94) 12.22,78.08 14,79.86 arc(14.14,80.07) 14.19,80.31 14.19,175.04 arc(14.24,175.28) 14.38,175.49 v1(18.63,179.74)
COMO3: length 123.1
  TOP w0.25: v1(19.91,178.47) 29.19,178.47 arc(29.32,178.45) RR1.4
  BOTTOM w0.25: v1(19.91,178.47) 15.01,173.58 arc(14.87,173.37) 14.83,173.13 14.83,78.41 arc(14.78,78.17) 14.64,77.96 12.22,75.54 arc(12.01,75.4) 11.77,75.35 6.83,75.35 arc(6.59,75.3) 6.38,75.16 X1.A26
COMO4: length 123.1
  TOP w0.25: RR2.1 v1(19.91,175.93)
  BOTTOM w0.25: v1(19.91,175.93) 15.65,171.68 arc(15.51,171.47) 15.46,171.23 15.46,76.5 arc(15.41,76.26) 15.27,76.05 12.22,73 arc(12.01,72.86) 11.77,72.81 6.83,72.81 arc(6.59,72.76) 6.38,72.62 X1.A25
COMO5: length 123.5
  TOP w0.25: RR2.2 v1(21.22,174.61)
  BOTTOM w0.25: X1.A24 6.38,70.08 arc(6.59,70.22) 6.83,70.27 11.77,70.27 arc(12.01,70.32) 12.22,70.46 15.91,74.15 arc(16.05,74.36) 16.09,74.6 16.09,169.22 arc(16.14,169.46) 16.28,169.67 v1(21.22,174.61)
COMO6: length 124
  TOP w0.25: RR2.3 v1(22.49,173.34)
  BOTTOM w0.25: X1.A23 6.38,67.54 arc(6.59,67.68) 6.83,67.73 11.77,67.73 arc(12.01,67.78) 12.22,67.92 16.54,72.24 arc(16.68,72.45) 16.73,72.69 16.73,167.32 arc(16.78,167.56) 16.92,167.76 v1(22.49,173.34)
COMO7: length 124.7
  TOP w0.25: RR2.4 23.96,172.02 arc(23.83,172.05) v1(23.72,172.12)
  BOTTOM w0.25: X1.A22 6.38,65 arc(6.59,65.14) 6.83,65.19 11.77,65.19 arc(12.01,65.24) 12.22,65.38 17.18,70.34 arc(17.32,70.54) 17.36,70.79 17.36,165.51 arc(17.41,165.75) 17.55,165.96 v1(23.72,172.12)
COMO8: length 18.5
  TOP w0.25: X1.C29 10.58,81.5 arc(10.78,81.37) 11.02,81.32 28.8,81.32
COMO9: length 18.7
  TOP w0.25: RR3.2 11.48,80 arc(11.24,79.95) 11.03,79.81 X1.C28
COMO10: length 19.2
  TOP w0.25: RR3.3 15.67,78.73 arc(15.43,78.68) 15.22,78.54 13.49,76.81 arc(13.28,76.67) 13.04,76.62 X1.C27
COMO11: length 19.7
  TOP w0.25: X1.C26 11.77,74.08 arc(12.01,74.13) 12.22,74.27 15.17,77.22 arc(15.38,77.36) 15.62,77.41 RR3.4
COMO12: length 19.8
  TOP w0.25: X1.C25 13.62,74.78 arc(13.83,74.92) 14.07,74.97 RR4.1
COMO13: length 20.3
  TOP w0.25: RR4.2 20.12,73.65 arc(19.88,73.6) 19.67,73.46 15.39,69.19 arc(15.19,69.05) 14.94,69 X1.C24
COMO14: length 20.8
  TOP w0.25: X1.C23 13.67,66.46 arc(13.92,66.51) 14.12,66.65 19.67,72.19 arc(19.88,72.33) 20.12,72.38 28.8,72.38
COMO15: length 21.3
  TOP w0.25: RR4.4 20.07,71.06 arc(19.83,71.01) 19.62,70.87 12.85,64.11 arc(12.65,63.97) 12.4,63.92 X1.C22
ENABLE: length 22.9
  TOP w0.25: R18.2 16.28,29.4 arc(16.14,29.6) 16.09,29.85 16.09,35.08 arc(16.05,35.32) 15.91,35.53 X1.C13
  BOTTOM w0.25: X1.A13 X1.C13
KCOMO0: length 105.6
  TOP w0.25: R9.1 v1(21.17,144.18)
  BOTTOM w0.25: X1.A21 6.38,62.46 arc(6.59,62.6) 6.83,62.65 20.02,62.65 arc(20.27,62.7) 20.47,62.84 20.99,63.35 arc(21.13,63.56) 21.17,63.8 v1(21.17,144.18)
KCOMO1: length 110.4
  TOP w0.25: R8.1 v1(22.44,142.91)
  BOTTOM w0.25: v1(22.44,142.91) 22,142.47 arc(21.86,142.26) 21.81,142.02 21.81,63.18 arc(21.76,62.93) 21.62,62.73 19.19,60.3 arc(18.99,60.16) 18.74,60.11 6.83,60.11 arc(6.59,60.06) 6.38,59.92 X1.A20
KCOMO2: length 105.1
  TOP w0.25: R7.1 v1(23.72,141.64)
  BOTTOM w0.25: v1(23.72,141.64) 22.63,140.56 arc(22.49,140.35) 22.44,140.11 22.44,62.54 arc(22.4,62.3) 22.26,62.09 17.92,57.76 arc(17.72,57.62) 17.47,57.57 6.83,57.57 arc(6.59,57.52) 6.38,57.38 X1.A19
KCOMO3: length 110
  TOP w0.25: R6.1 v1(24.98,140.37)
  BOTTOM w0.25: v1(24.98,140.37) 23.27,138.66 arc(23.13,138.45) 23.08,138.21 23.08,61.91 arc(23.03,61.67) 22.89,61.46 16.65,55.22 arc(16.44,55.08) 16.2,55.03 6.83,55.03 arc(6.59,54.98) 6.38,54.84 X1.A18
KCOMO4: length 104.7
  TOP w0.25: R5.1 v1(26.25,139.1)
  BOTTOM w0.25: v1(26.25,139.1) 23.9,136.75 arc(23.76,136.54) 23.72,136.3 23.72,61.28 arc(23.67,61.03) 23.53,60.83 15.38,52.68 arc(15.17,52.54) 14.93,52.49 6.83,52.49 arc(6.59,52.44) 6.38,52.3 X1.A17
KCOMO5: length 109.5
  TOP w0.25: R4.1 v1(27.52,137.83)
  BOTTOM w0.25: v1(27.52,137.83) 24.54,134.84 arc(24.4,134.64) 24.35,134.4 24.35,60.64 arc(24.3,60.4) 24.16,60.19 14.11,50.14 arc(13.91,50) 13.66,49.95 6.83,49.95 arc(6.59,49.9) 6.38,49.76 X1.A16
KCOMO6: length 104.6
  TOP w0.25: R3.1 28.42,136.56 arc(28.18,136.52) 27.97,136.38 v1(27.52,135.93)
  BOTTOM w0.25: X1.A15 6.38,47.22 arc(6.59,47.36) 6.83,47.41 12.39,47.41 arc(12.64,47.46) 12.84,47.6 24.8,59.55 arc(24.94,59.76) 24.98,60 24.98,133.13 arc(25.03,133.37) 25.17,133.57 v1(27.52,135.93)
KCOMO7: length 109.5
  TOP w0.25: v1(28.8,134.66) 29.24,135.11 arc(29.45,135.25) 29.69,135.29 R2.1
  BOTTOM w0.25: v1(28.8,134.66) 25.81,131.67 arc(25.67,131.46) 25.62,131.22 25.62,59.37 arc(25.57,59.13) 25.43,58.92 11.57,45.06 arc(11.36,44.92) 11.12,44.87 6.83,44.87 arc(6.59,44.82) 6.38,44.68 X1.A14
KCOMO8: length 27.3
  TOP w0.25: R17.1 27.79,43.22 arc(27.55,43.27) 27.34,43.41 22,48.75 arc(21.86,48.95) 21.81,49.2 21.81,51.21 arc(21.76,51.45) 21.62,51.66 12.09,61.19 arc(11.88,61.33) 11.64,61.38 X1.C21
KCOMO9: length 31.9
  TOP w0.25: R16.1 27.79,41.95 arc(27.54,42) 27.34,42.13 21.36,48.11 arc(21.22,48.32) 21.17,48.56 21.17,50.58 arc(21.13,50.82) 20.99,51.03 13.36,58.65 arc(13.15,58.79) 12.91,58.84 X1.C20
KCOMO10: length 26.3
  TOP w0.25: R15.1 27.79,40.68 arc(27.55,40.73) 27.34,40.87 20.73,47.48 arc(20.59,47.68) 20.54,47.93 20.54,49.94 arc(20.49,50.18) 20.35,50.39 14.63,56.11 arc(14.42,56.25) 14.18,56.3 X1.C19
KCOMO11: length 29.4
  TOP w0.25: X1.C18 11.64,53.76 arc(11.88,53.71) 12.09,53.57 26.07,39.59 arc(26.28,39.46) 26.52,39.41 R14.1
KCOMO12: length 23.8
  TOP w0.25: X1.C17 12.91,51.22 arc(13.15,51.17) 13.36,51.03 26.07,38.32 arc(26.27,38.19) 26.52,38.14 R13.1
KCOMO13: length 28.3
  TOP w0.25: X1.C16 14.18,48.68 arc(14.42,48.63) 14.63,48.49 26.07,37.06 arc(26.28,36.92) 26.52,36.87 R12.1
KCOMO14: length 22.7
  TOP w0.25: X1.C15 15.45,46.14 arc(15.69,46.09) 15.9,45.95 26.07,35.78 arc(26.28,35.65) 26.52,35.6 R11.1
KCOMO15: length 27.3
  TOP w0.25: R10.1 26.52,34.33 arc(26.28,34.38) 26.07,34.51 17.17,43.41 arc(16.96,43.55) 16.72,43.6 X1.C14
KENABLE: length 30
  TOP w0.25: R22.2 17.63,17.82 arc(17.39,17.87) 17.18,18 15.01,20.17 arc(14.87,20.38) 14.83,20.62 14.83,33.81 arc(14.78,34.05) 14.64,34.26 X1.C12
  BOTTOM w0.25: X1.A12 X1.C12
N1355638: length 14
  TOP w0.453: R19.1 49.34,15.95 ; R19.1 50.27,14.64 ; R19.1 48.42,14.64 ; R19.1 49.34,13.34 ; VD3.A 53.74,20.5 ; VD3.A 50.84,20.5 ; VD3.A 52.29,19.05 ; VD3.A 52.29,21.96 ; C3.1 47.86,17.82 ; C3.1 46.8,16.49 ; C3.1 46.8,19.15
N1355646: length 14.6
  TOP w0.25: DA2.5 30.96,13.37 arc(30.72,13.42) 30.51,13.56 29.61,14.46 arc(29.41,14.6) 29.17,14.64 DA2.3 C4.1 R21.2 R23.2
N1356446: length 3.3
  TOP w0.25: RR1.5 32.98,178.03 arc(33.18,177.89) 33.43,177.84 35.78,177.84
N1356458: length 3.3
  TOP w0.25: DD1.3 34.77,179.11 arc(34.53,179.16) 34.32,179.3 34.11,179.51 arc(33.9,179.65) 33.66,179.69 RR1.6
N1356478: length 3.3
  TOP w0.25: 35.78,180.38 34.77,180.38 arc(34.53,180.43) 34.32,180.56 34.11,180.78 arc(33.9,180.92) 33.66,180.96 RR1.7
N1356494: length 3.4
  TOP w0.25: DD1.1 34.77,181.65 arc(34.53,181.7) 34.32,181.84 34.06,182.1 arc(33.85,182.24) 33.61,182.28 RR1.8
N1356502: length 3.4
  TOP w0.25: RR2.8 33.08,176.38 arc(33.28,176.52) 33.53,176.57 DD1.5
N1356524: length 3.4
  TOP w0.25: RR2.7 32.68,174.66 33.61,174.66 arc(33.85,174.71) 34.06,174.85 34.32,175.11 arc(34.53,175.25) 34.77,175.3 DD1.6
N1356542: length 3.4
  TOP w0.25: RR2.6 32.68,173.39 33.61,173.39 arc(33.85,173.44) 34.06,173.58 34.32,173.84 arc(34.53,173.98) 34.77,174.03 DD1.7
N1356554: length 3.4
  TOP w0.25: RR2.5 33.51,172.02 arc(33.75,172.07) 33.96,172.21 34.32,172.57 arc(34.53,172.71) 34.77,172.76 DD1.8
N1357124: length 3.3
  TOP w0.25: DD2.4 32.79,76.87 arc(32.55,76.92) 32.34,77.06 RR3.5
N1357136: length 3.3
  TOP w0.25: RR3.6 33.03,78.73 arc(33.27,78.68) 33.48,78.54 33.69,78.33 arc(33.89,78.19) 34.14,78.14 DD2.3
N1357148: length 3.3
  TOP w0.25: DD2.2 34.14,79.41 arc(33.89,79.46) 33.69,79.6 33.48,79.81 arc(33.27,79.95) 33.03,80 RR3.7
N1357164: length 3.4
  TOP w0.25: DD2.1 34.14,80.68 arc(33.89,80.73) 33.69,80.87 33.43,81.13 arc(33.22,81.27) 32.98,81.32 31.99,81.32
N1357172: length 3.4
  TOP w0.25: RR4.8 32.44,75.42 arc(32.65,75.56) 32.89,75.6 DD2.5
N1357190: length 3.4
  TOP w0.25: DD2.6 34.14,74.33 arc(33.89,74.29) 33.69,74.15 33.43,73.88 arc(33.22,73.75) 32.98,73.7 32.05,73.7 RR4.7
N1357214: length 3.4
  TOP w0.25: DD2.7 34.14,73.06 arc(33.89,73.02) 33.69,72.88 33.43,72.62 arc(33.22,72.48) 32.98,72.43 32.05,72.43 31.99,72.38
N1357226: length 3.4
  TOP w0.25: DD2.8 34.14,71.79 arc(33.89,71.75) 33.69,71.61 33.33,71.25 arc(33.12,71.11) 32.88,71.06 RR4.5
N1358398: length 7
  TOP w0.4: DA1.1 48.74,10.83 arc(48.5,10.88) 48.29,11.02 47.39,11.92 arc(47.19,12.06) 46.95,12.1 R20.2 46.4,13.44 46.34,13.5 R19.2
N1359348: length 16.4
  TOP w0.25: DD3.15 41.49,141.27 arc(41.45,141.03) 41.31,140.82 39.78,139.29 arc(39.57,139.15) 39.33,139.1 R5.2
N1359364: length 9.1
  TOP w0.25: DD3.14 40.22,141.91 arc(40.18,141.66) 40.04,141.46 39.14,140.56 arc(38.94,140.42) 38.69,140.37 R6.2
N1359384: length 12.2
  TOP w0.25: R7.2 38.32,141.64 arc(38.77,141.83) 38.95,142.28 38.95,147.58
N1359396: length 4.7
  TOP w0.25: DD3.12 37.68,143.34 arc(37.64,143.11) R8.2
N1359412: length 6.2
  TOP w0.25: 36.41,147.58 36.41,146.35 arc(36.37,146.11) 36.23,145.9 34.7,144.37 arc(34.49,144.23) 34.25,144.18 R9.2
N1359430: length 13.8
  TOP w0.25: R4.2 40.6,137.83 arc(40.84,137.88) 41.05,138.02 42.58,139.55 arc(42.72,139.76) 42.77,140 DD3.16
N1359442: length 21.1
  TOP w0.25: DD3.17 44.03,139.37 arc(43.99,139.12) 43.85,138.92 41.68,136.75 arc(41.48,136.61) 41.23,136.56 R3.2
N1359460: length 18.2
  TOP w0.25: R2.2 41.87,135.29 arc(42.11,135.34) 42.32,135.48 45.12,138.28 arc(45.26,138.49) 45.3,138.73 DD3.18
N1359476: length 18.2
  TOP w0.25: DD4.18 44.67,37.77 arc(44.62,37.52) 44.48,37.32 41.68,34.51 arc(41.48,34.38) 41.23,34.33 R10.2
N1359548: length 21.1
  TOP w0.25: R11.2 40.6,35.6 arc(40.84,35.65) 41.05,35.78 43.21,37.95 arc(43.35,38.16) 43.4,38.4 DD4.17
N1359630: length 13.8
  TOP w0.25: DD4.16 42.13,39.04 arc(42.08,38.79) 41.94,38.59 40.41,37.06 arc(40.21,36.92) 39.96,36.87 R12.2
N1359720: length 16.4
  TOP w0.25: R13.2 38.69,38.14 arc(38.94,38.19) 39.14,38.32 40.67,39.86 arc(40.81,40.06) 40.86,40.31 DD4.15
N1359780: length 9.1
  TOP w0.25: DD4.14 39.59,40.94 arc(39.54,40.7) 39.4,40.49 38.51,39.59 arc(38.3,39.46) 38.06,39.41 R14.2
N1359844: length 12.2
  TOP w0.25: DD4.13 38.32,41.31 arc(38.13,40.86) 37.68,40.68 R15.2
N1359856: length 4.7
  TOP w0.25: DD4.12 37.05,42.37 arc(37,42.14) R16.2
N1359868: length 6.2
  TOP w0.25: DD4.11 35.78,45.39 arc(35.73,45.14) 35.59,44.94 34.06,43.41 arc(33.86,43.27) 33.61,43.22 R17.2
N1360082: length 3.3
  TOP w0.25: AV1.2 R18.1
N1360698: length 4.7
  TOP w0.25: R22.1 23.45,17.82 arc(23.7,17.77) 23.9,17.63 24.16,17.37 arc(24.37,17.23) 24.61,17.18 DA2.1

## Copper pours and planes (outline as drawn; the poured copper is in the pictures)
GNDE on BOTTOM: 61.18,228.64 60.62,229.99 59.27,230.54 3.39,230.54 2.05,229.99 1.49,228.64 1.49,4.48 2.05,3.14 3.39,2.58 73.88,2.58 75.23,3.14 75.78,4.48 75.78,10.83 75.23,12.18 73.88,12.74 63.08,12.74 61.74,13.3 61.18,14.64 ; 1 cut-out
Net_1 on BOTTOM: 101.3,122.75 101.3,110.75 94.3,110.75 94.3,122.75
Net_2 on TOP: 101.3,122.75 101.3,110.75 94.3,110.75 94.3,122.75
N1355638 on TOP: 61.18,23.53 48.48,23.53 46.82,23.11 45.94,21.63 45.94,12.74 49.11,12.74 49.11,2.58 73.88,2.58 75.23,3.14 75.78,4.48 75.78,10.83 75.23,12.18 73.88,12.74 63.08,12.74 61.74,13.3 61.18,14.64
GNDE on TOP: 61.18,228.64 60.62,229.99 59.27,230.54 3.39,230.54 2.05,229.99 1.49,228.64 1.49,4.48 2.05,3.14 3.39,2.58 61.18,2.58 ; 9 cut-outs

## Text on the board
Ref Des/Silkscreen Top: December 2013 | KPRM_02v2
PLACE_BOUND_TOP: December 2013 | KPRM_02v2
PLACE_BOUND_BOTTOM: FIGURE | SIZE | 0.5 | 1.0 | 2.0 | 2.7 | DRILL CHART: TOP to BOTTOM | ALL UNITS ARE IN MILLIMETERS | PLATED | NON-PLATED | QTY | 226 | 194 | 60 | 4 | 2
